# Altium PCB Header-PinHeader.PcbDoc
Units mm, origin at the board's own origin, x right, y up, seen from the top; angles counter-clockwise.
Board outline 48 x 30 mm, 2 copper layers (Top Layer, Bottom Layer); 4 components, 20 nets, 42 pads, 0 vias.
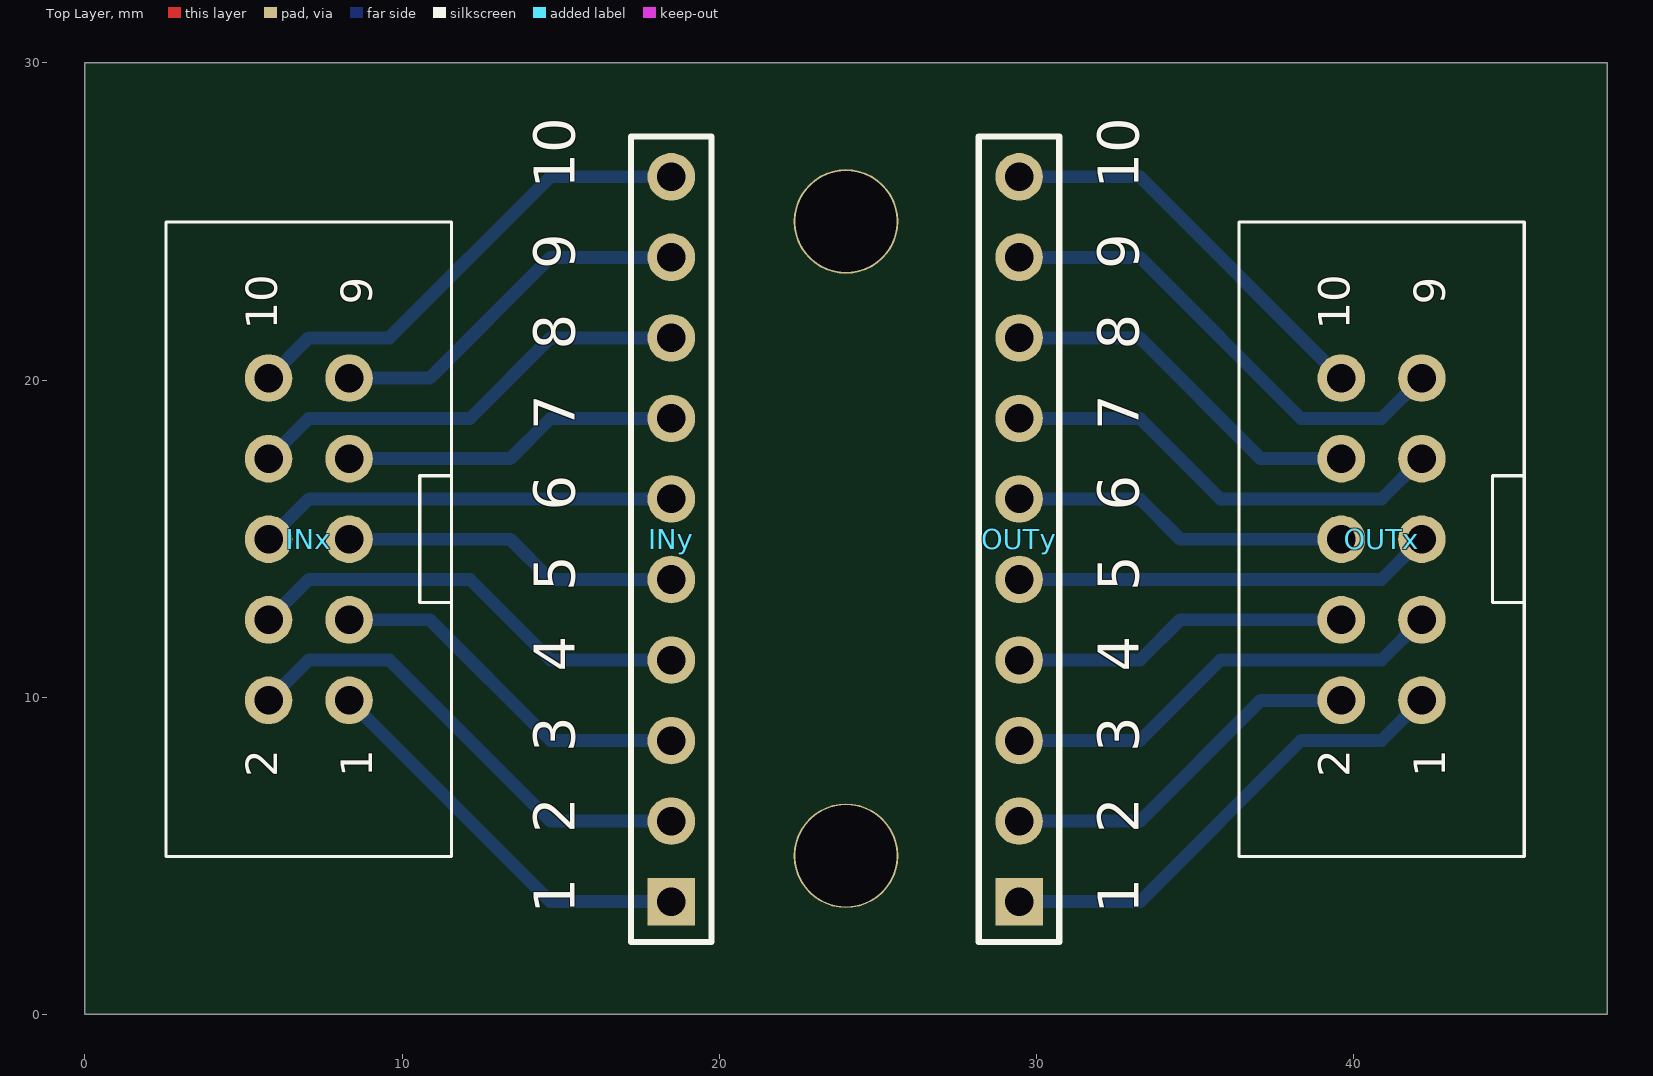
[diagram p0: Top Layer view]
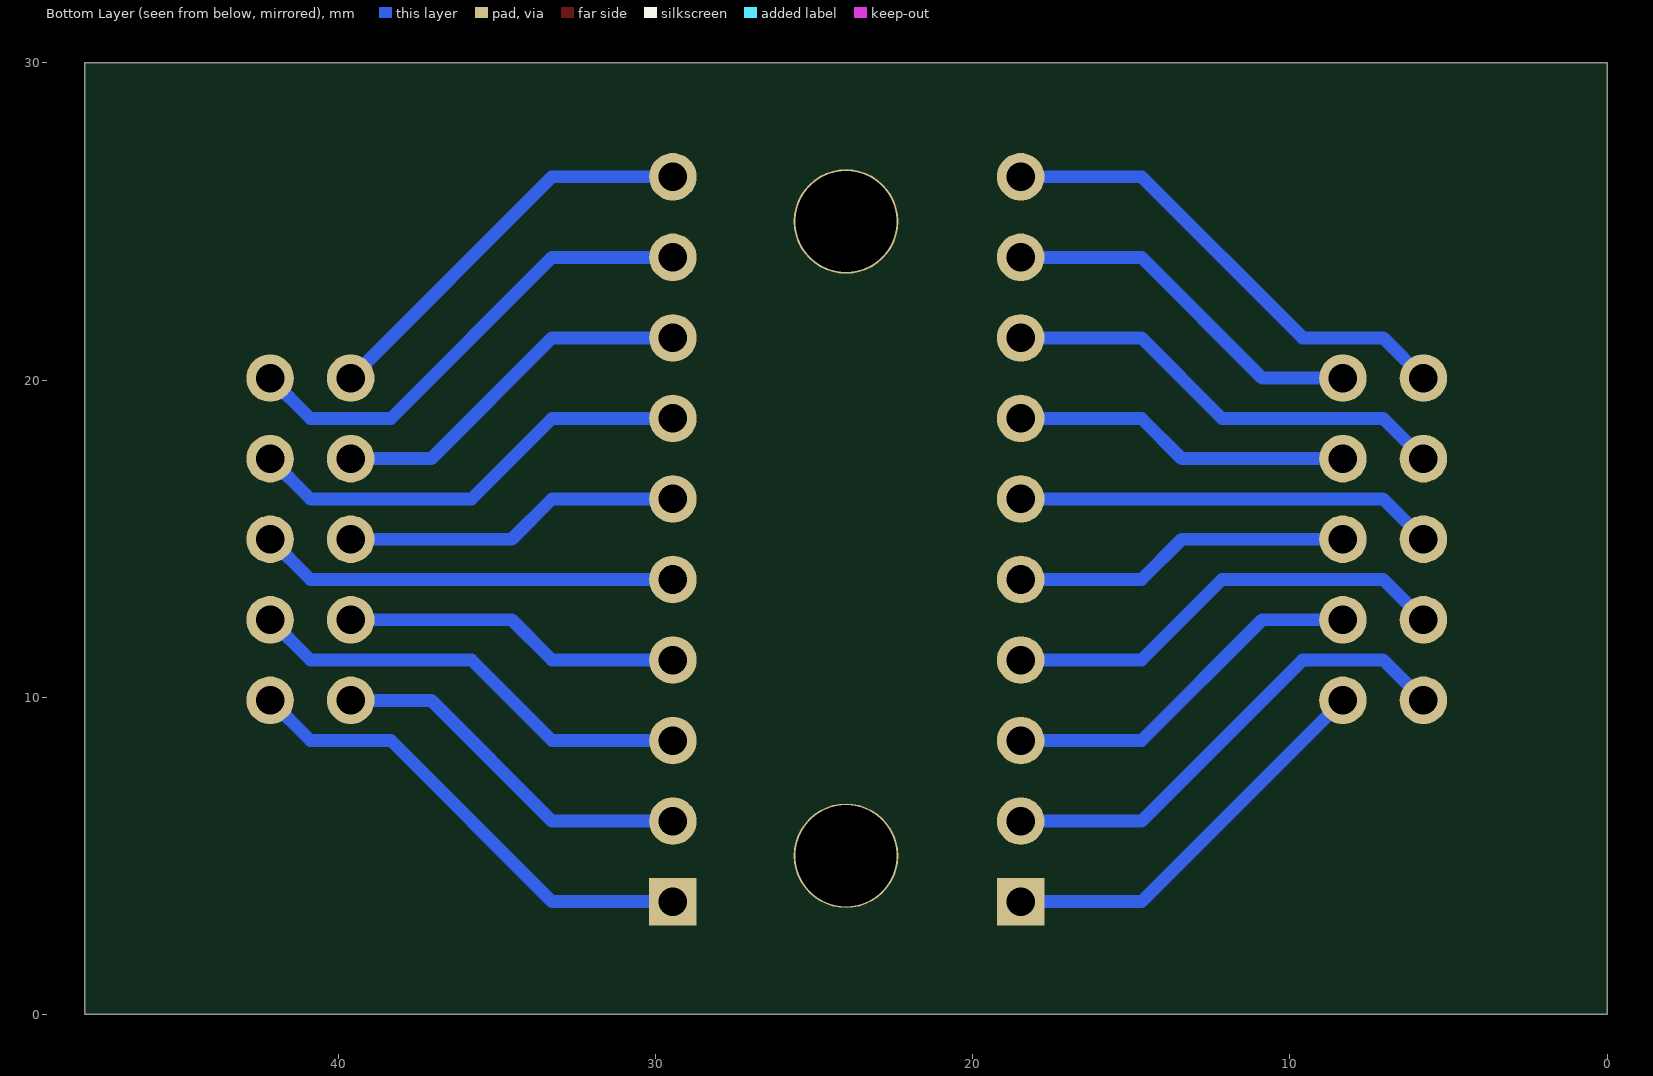
[diagram p1: Bottom Layer view, seen from below]

## Layer stack, top to bottom
Top Layer: signal copper 0.0356
Dielectric: dielectric 0.32, FR-4, Dk 4.8
Bottom Layer: signal copper 0.0356

## Board outline
0,0 48,0 48,30 0,30

## Design rules (kind name [scope] priority, off if disabled: settings)
Clearance [All] p1: gap=0.152
Height [All] p1: minheight=0 maxheight=100 prefheight=12.7
HoleSize [All] p1: absolutevalues=TRUE maxlimit=5 minlimit=0.025 maxpercent=80.000 minpercent=20.000
MinimumSolderMaskSliver [All] p1: minsoldermaskwidth=0.152
PolygonConnect [All] p1: connectstyle=Relief reliefconductorwidth=0.254 reliefentries=4 polygonreliefangle="90 Angle" airgapwidth=0.254
RoutingVias [All] p1: holewidth=0.711 width=1.27 viastyle="Through Hole" minholewidth=0.711 minwidth=1.27 maxholewidth=0.711 maxwidth=1.27
SilkToSilkClearance [All] p1 off: silktosilkclearance=0.152
SilkscreenOverComponentPads [All] p1 off: minsilkscreentomaskgap=0.152
SolderMaskExpansion [All] p1: expansion=0.102
Width [All] p1: maxlimit=2 minlimit=0.152 preferedwidth=0.254
23 further rules are at their usual default settings.

## Components (designator, comment, footprint, x,y, rotation, side; value= is the part's Value field where it differs from the comment)
INx "10 pol Header" "10 pol Header" 7.06,14.98 r90 top
INy "Header 10" HDR1X10 18.49,3.55 r90 top
OUTx "10 pol Header" "10 pol Header" 40.89,14.98 r90 top
OUTy "Header 10" HDR1X10 29.46,3.55 r90 top

## Footprints (in the part's own frame and the unit in brackets; to place one, negate y for a bottom-side part, rotate by r counter-clockwise, add the part's x,y. Pads: shape width x height; smd on the part's side, far side on the other; paste and mask are expansions set on the pad)
"10 pol Header" [mm]
  round 1.5 hole 0.9: 1(-5.08,-1.27) 2(-5.08,1.27) 3(-2.54,-1.27) 4(-2.54,1.27) 5(0,-1.27) 6(0,1.27) 7(2.54,-1.27) 8(2.54,1.27) 9(5.08,-1.27) 10(5.08,1.27)
  silkscreen extent -10,-4.5 10,4.5, body extent -10,-4.5 10,4.5, height 9
HDR1X10 [mm] "Connector; Header; 10 Position"
  rect 1.5x1.5 hole 0.9: 1(0,0)
  round 1.5 hole 0.9: 2(2.54,0) 3(5.08,0) 4(7.62,0) 5(10.16,0) 6(12.7,0) 7(15.24,0) 8(17.78,0) 9(20.32,0) 10(22.86,0)
  silkscreen extent -1.27,-1.27 24.13,1.27

## Part data
INy OUTy: "Header, 10-Pin"

## Free pads (board coordinates)
  round 3.3 hole 3.2: 0(24,5) 0(24,25)

## Nets (pads, with @x,y where several pads share a name; then routed paths per layer and width w, separated by ;. In a path a pad name is that pad's centre, name@x,y a point inside that pad or via, vN(x,y) a via of type N, cw(c..) or ccw(c..) an arc to the next point about the centre after c; other vN are vias at no path point)
IN_1: INx.1 INy.1 | length 12.8
  Bottom Layer w0.406: INx.1 14.68,3.55 INy.1
IN_2: INx.2 INy.2 | length 15.3
  Bottom Layer w0.406: INx.2 7.06,11.17 9.6,11.17 14.68,6.09 INy.2
IN_3: INx.3 INy.3 | length 11.7
  Bottom Layer w0.406: INx.3 10.87,12.44 14.68,8.63 INy.3
IN_4: INx.4 INy.4 | length 14.3
  Bottom Layer w0.406: INx.4 7.06,13.71 12.14,13.71 14.68,11.17 INy.4
IN_5: INx.5 INy.5 | length 10.7
  Bottom Layer w0.406: INx.5 13.41,14.98 14.68,13.71 INy.5
IN_6: INx.6 INy.6 | length 13.2
  Bottom Layer w0.406: INx.6 7.06,16.25 INy.6
IN_7: INx.7 INy.7 | length 10.7
  Bottom Layer w0.406: INx.7 13.41,17.52 14.68,18.79 INy.7
IN_8: INx.8 INy.8 | length 14.3
  Bottom Layer w0.406: INx.8 7.06,18.79 12.14,18.79 14.68,21.33 INy.8
IN_9: INx.9 INy.9 | length 11.7
  Bottom Layer w0.406: INx.9 10.87,20.06 14.68,23.87 INy.9
IN_10: INx.10 INy.10 | length 15.3
  Bottom Layer w0.406: INx.10 7.06,21.33 9.6,21.33 14.68,26.41 INy.10
OUT_1: OUTx.1 OUTy.1 | length 15.3
  Bottom Layer w0.406: OUTy.1 33.27,3.55 38.35,8.63 40.89,8.63 OUTx.1
OUT_2: OUTx.2 OUTy.2 | length 11.7
  Bottom Layer w0.406: OUTy.2 33.27,6.09 37.08,9.9 OUTx.2
OUT_3: OUTx.3 OUTy.3 | length 14.3
  Bottom Layer w0.406: OUTy.3 33.27,8.63 35.81,11.17 40.89,11.17 OUTx.3
OUT_4: OUTx.4 OUTy.4 | length 10.7
  Bottom Layer w0.406: OUTy.4 33.27,11.17 34.54,12.44 OUTx.4
OUT_5: OUTx.5 OUTy.5 | length 13.2
  Bottom Layer w0.406: OUTy.5 40.89,13.71 OUTx.5
OUT_6: OUTx.6 OUTy.6 | length 10.7
  Bottom Layer w0.406: OUTy.6 33.27,16.25 34.54,14.98 OUTx.6
OUT_7: OUTx.7 OUTy.7 | length 14.3
  Bottom Layer w0.406: OUTy.7 33.27,18.79 35.81,16.25 40.89,16.25 OUTx.7
OUT_8: OUTx.8 OUTy.8 | length 11.7
  Bottom Layer w0.406: OUTy.8 33.27,21.33 37.08,17.52 OUTx.8
OUT_9: OUTx.9 OUTy.9 | length 15.3
  Bottom Layer w0.406: OUTy.9 33.27,23.87 38.35,18.79 40.89,18.79 OUTx.9
OUT_10: OUTx.10 OUTy.10 | length 12.8
  Bottom Layer w0.406: OUTy.10 33.27,26.41 OUTx.10

## Silkscreen, mask and mechanical layers (free items; w line width, h text height)
Top Overlay:
  text "10" at 15.875,26.035 h2.2 r90
  text "10" at 33.655,26.035 h2.2 r90
  text "9" at 15.875,23.495 h2.2 r90
  text "9" at 33.655,23.495 h2.2 r90
  text "8" at 15.875,20.955 h2.2 r90
  text "8" at 33.655,20.955 h2.2 r90
  text "7" at 15.875,18.415 h2.2 r90
  text "7" at 33.655,18.415 h2.2 r90
  text "6" at 15.875,15.875 h2.2 r90
  text "6" at 33.655,15.875 h2.2 r90
  text "5" at 15.875,13.335 h2.2 r90
  text "5" at 33.655,13.335 h2.2 r90
  text "4" at 15.875,10.795 h2.2 r90
  text "4" at 33.655,10.795 h2.2 r90
  text "3" at 15.875,8.255 h2.2 r90
  text "3" at 33.655,8.255 h2.2 r90
  text "2" at 15.875,5.715 h2.2 r90
  text "2" at 33.655,5.715 h2.2 r90
  text "1" at 15.875,3.175 h2.2 r90
  text "1" at 33.655,3.175 h2.2 r90

## Text inside footprints (layer, text, board x,y; h text height)
INx: Top Overlay "1" at 9.06,7.48 h1 r90; Top Overlay "2" at 6.06,7.48 h1 r90; Top Overlay "9" at 9.06,22.38 h1 r90; Top Overlay "10" at 6.06,21.58 h1 r90
OUTx: Top Overlay "1" at 42.89,7.48 h1 r90; Top Overlay "2" at 39.89,7.48 h1 r90; Top Overlay "9" at 42.89,22.38 h1 r90; Top Overlay "10" at 39.89,21.58 h1 r90